# EAGLE board HotlineBling.withname (EAGLE 7.2.0)
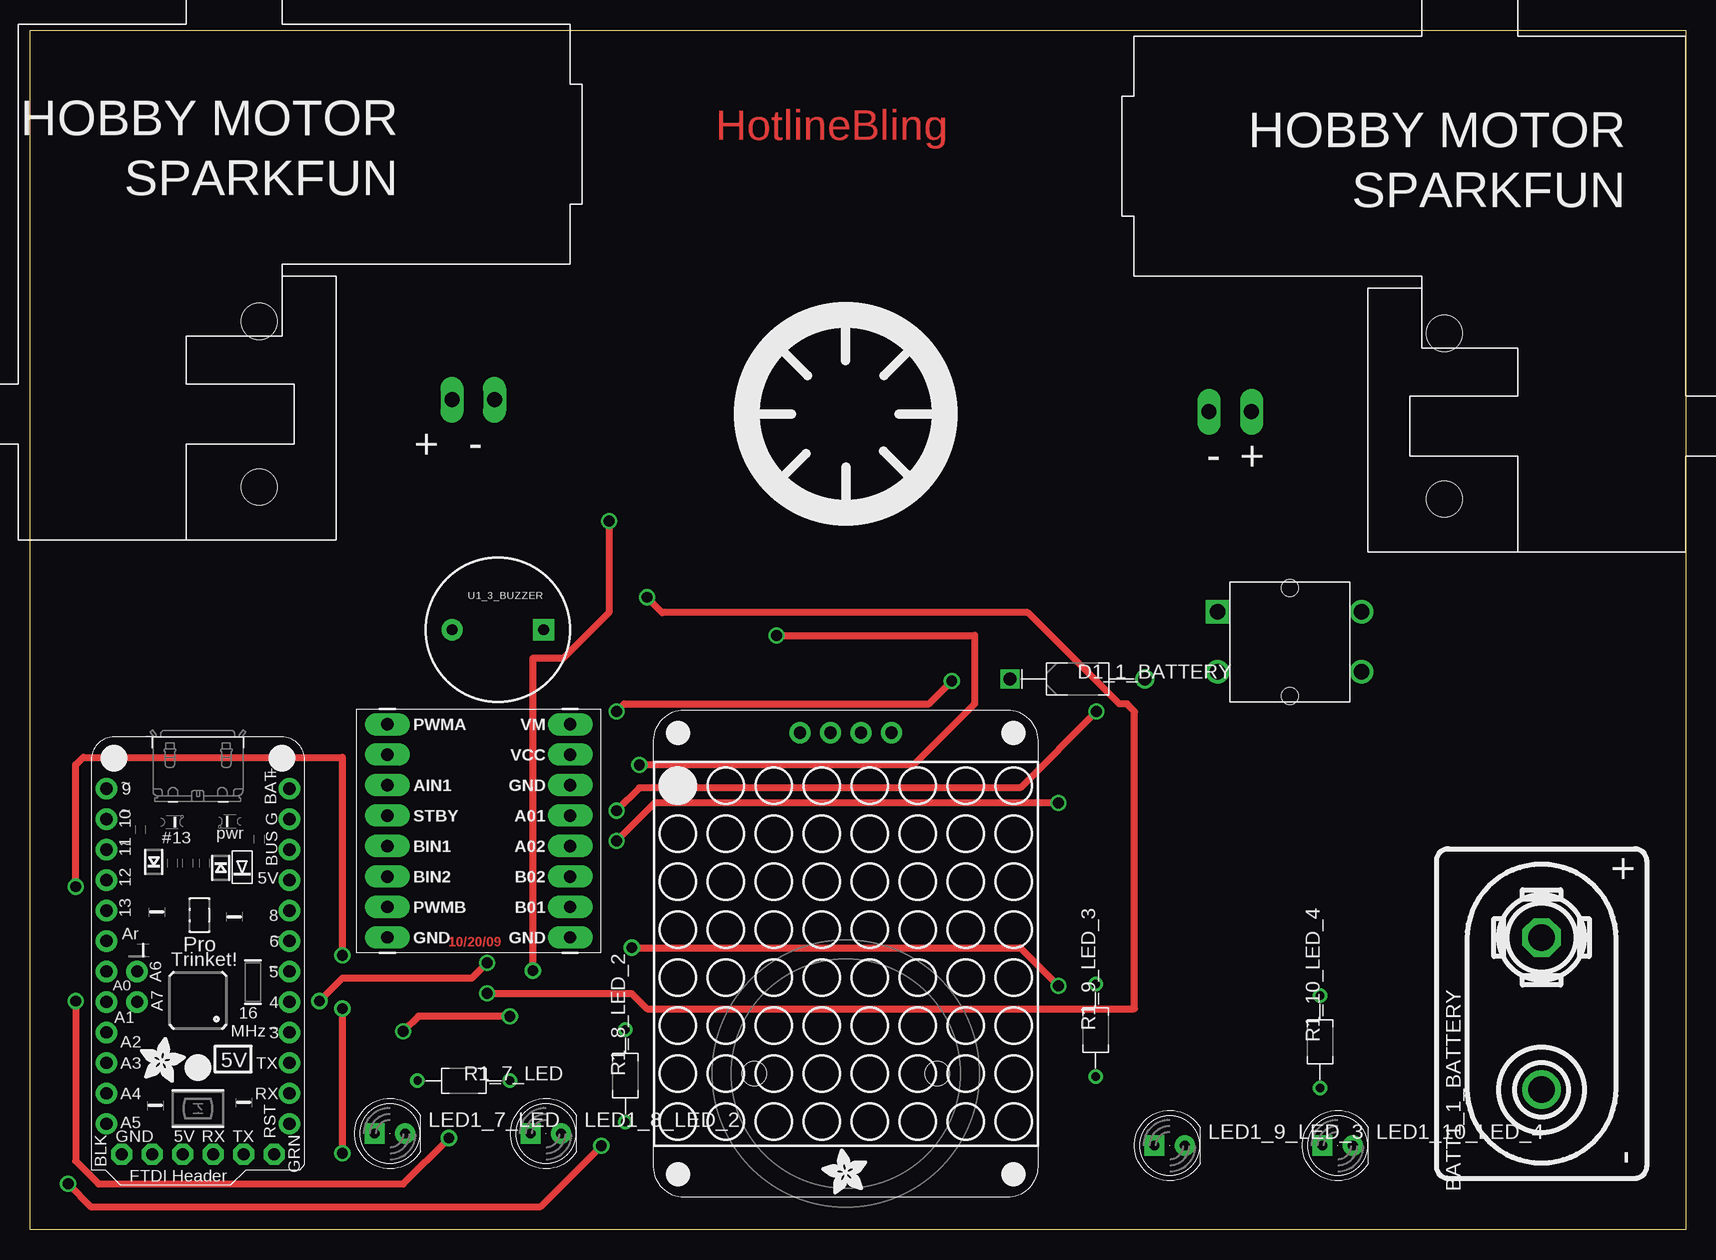
[diagram p0: board, top side]
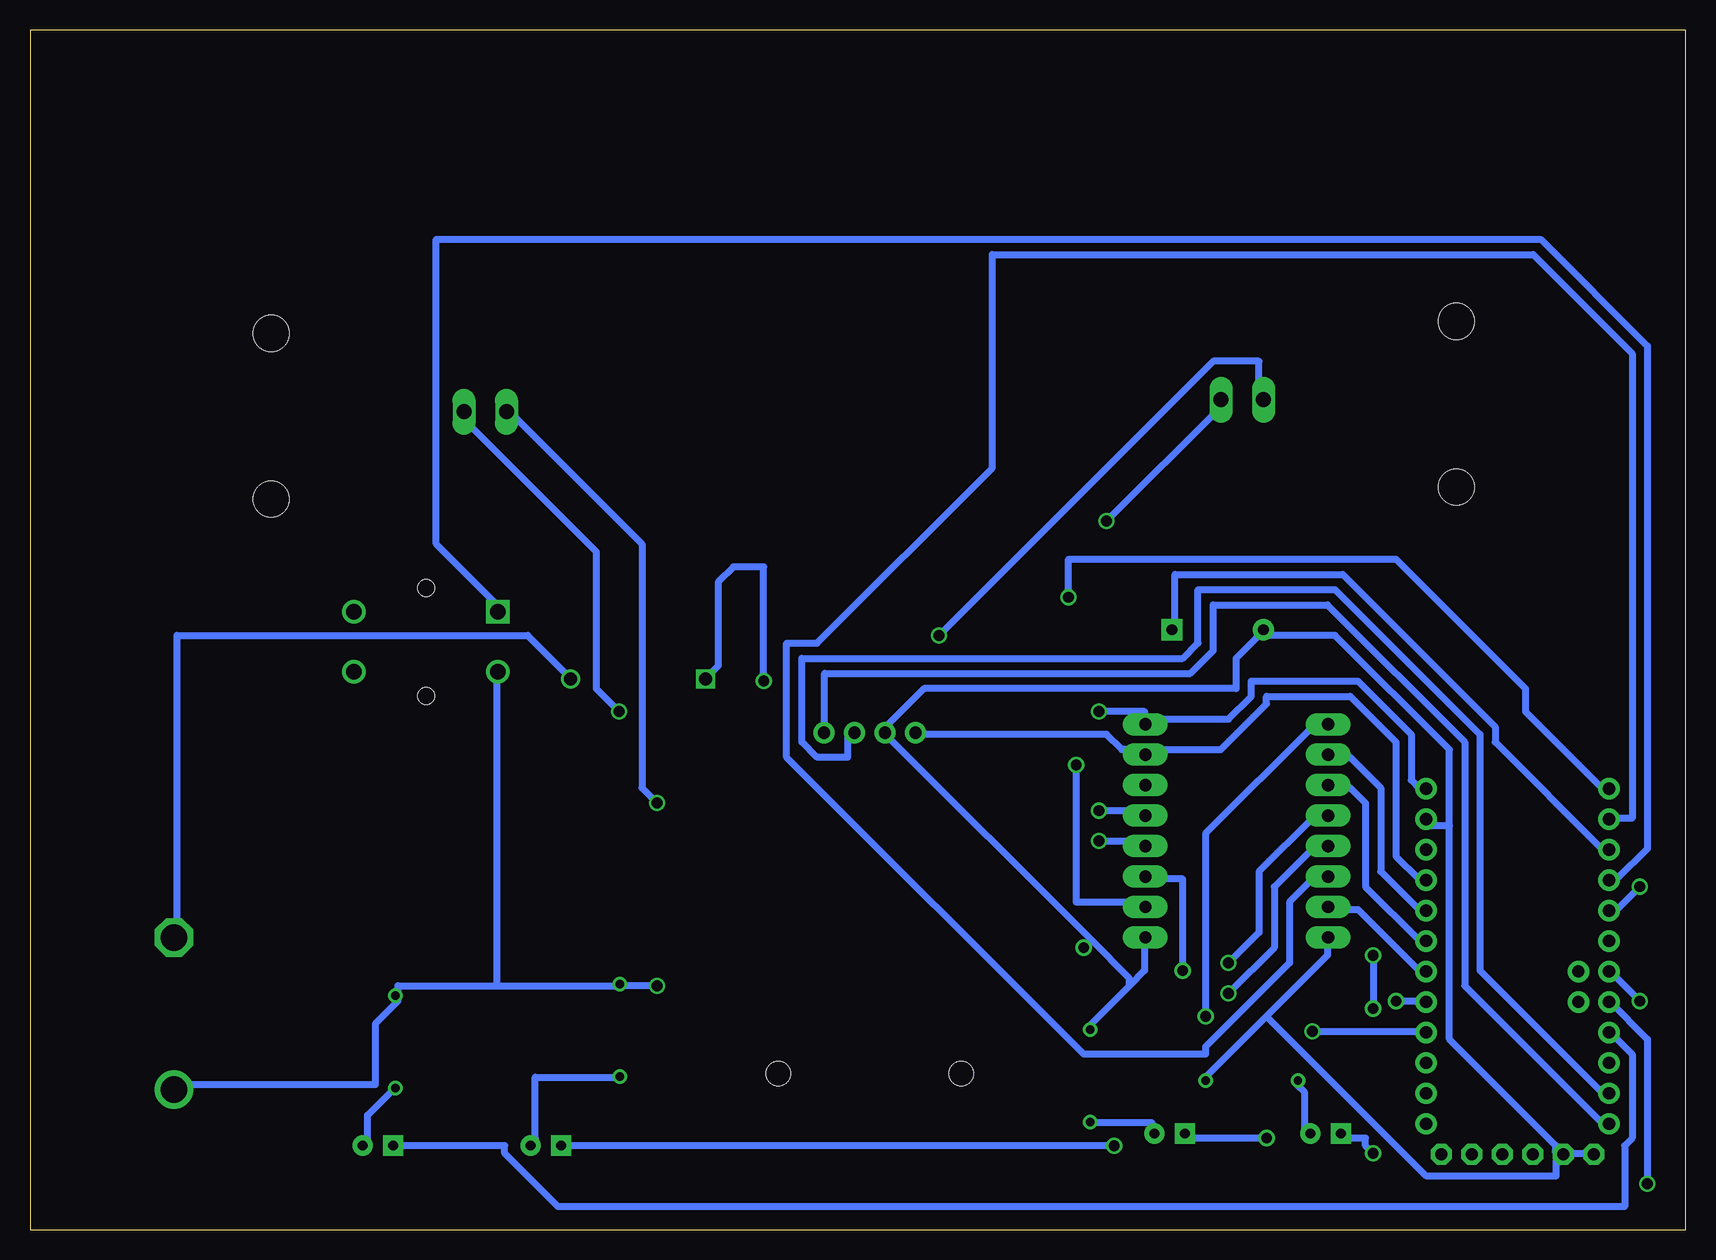
[diagram p1: board, bottom side, seen from below]

Size 138 x 100 mm. Coordinates in mm from the lower left corner, seen from the top.
Outline: 0,0 0,100 138,100 138,0 0,0
Copper layers (1*16): Top 0.035mm / dielectric 1.5mm / Bottom 0.035mm
Design rules "default": minimum track width 0.6mm, minimum drill 0.9mm, track to track 15mil, track to pad 0.6mm, pad to pad 0.5mm, via to via 0.38mm, smd to smd 8mil, copper to edge 40mil, drill to drill 8mil, minimum pad ring 10mil, minimum via ring 8mil, stop-mask expansion 4mil, vias tented up to drill 0mil, thermal gap 10mil
tRestrict: area 106,5.3 to 109.5,8.7; area 106.1,10.3 to 109,13.2; area 106.1,18 to 109,20.9; area 108.5,5.3 to 112,8.7; area 123.4,21.8 to 128.6,26.9; area 123.4,9.1 to 128.6,14.2; area 19.8,14.6 to 23.4,18.2; area 19.8,17.2 to 23.4,20.8; area 19.8,19.7 to 23.4,23.3; area 19.8,22.3 to 23.4,25.8; area 19.8,24.8 to 23.4,28.4; area 19.8,27.3 to 23.4,30.9; 55 more areas
vRestrict: area -32,34 to 47.4,107.6; area 106,4.1 to 111.5,9.9; area 106.2,11 to 108.9,20.3; area 115.8,2.8 to 136.2,33.2; area 27,5.1 to 32.5,10.9; area 27.2,23 to 47.6,43.5; area 31.5,11.1 to 40.8,13.7; area 32.7,43.7 to 45.3,56.3; area 40,5.1 to 45.5,10.9; area 48.3,8.1 to 51,17.5; area 5.1,3.7 to 22.9,41.7; area 51.5,2 to 84.5,44; 7 more areas

## Footprints (pad centres in the part's own frame; a part is rotated, then mirrored left to right if it is on the bottom)
BUTTON-TACTILE-SQUARE-ADAFRUIT1010 = drill 1.3 square: P -6,2.5 | drill 1.3: P2 6,2.5; S -6,-2.5; S2 6,-2.5 | hole 1.4: 0,-4.5; 0,4.5
BATTERY_9V_KEYSTONE_968 = drill 2.2: N 6.35,0 | drill 2.2 octagon: P -6.35,0
DIOAD1125W78L520D270_HS = drill 1.06 pad 1.59: A 5.625,0 | drill 1.06 pad 1.59 square: C -5.625,0
SPARKFUN_DUAL_MOTOR_DRIVER = drill 1.016 pad 1.88 long: A01 7.62,1.27; A02 7.62,-1.27; AIN1 -7.62,3.81; AIN2 -7.62,6.35; B01 7.62,-6.35; B02 7.62,-3.81; BIN1 -7.62,-1.27; BIN2 -7.62,-3.81; GND -7.62,-8.89; GND1 7.62,3.81; GND2 7.62,-8.89; PWMA -7.62,8.89; PWMB -7.62,-6.35; STBY -7.62,1.27; VCC 7.62,6.35; VM 7.62,8.89
SPARKFUN_HOBBY_MOTOR_LEFT = drill 1.27 long: + -41.18,-1.18; - -44.72,-1.18 | hole 3: -25.1,-7.7; -25.1,6.1
LED5MM = drill 0.813 pad 1.676 square: A -1.27,0 | drill 0.813 pad 1.676: K 1.27,0
RESAD770W45L370D210_HS = drill 0.7 pad 1.1: 1 -3.85,0; 2 3.85,0
SPARKFUN_HOBBY_MOTOR = drill 1.27 long: + 41.18,-1.18; - 44.72,-1.18 | hole 3: 25.1,-7.7; 25.1,6.1
ADAFRUIT-PRO-TRINKET-5V = drill 1.016 pad 1.778: +5V 7.62,24.13; A0 -7.62,16.51; A1 -7.62,13.97; A2 -7.62,11.43; A3 -7.62,8.89; A4 -7.62,6.35; A5 -7.62,3.81; AREF -7.62,19.05; D3 7.62,11.43; D4 7.62,13.97; D5 7.62,16.51; D6 7.62,19.05; D8 7.62,21.59; D9 -7.62,31.75; D10 -7.62,29.21; D11 -7.62,26.67; D12 -7.62,24.13; D13 -7.62,21.59; GND2 7.62,29.21; RESET 7.62,3.81; RXD1 7.62,6.35; TXD1 7.62,8.89; VBAT 7.62,31.75; VBUS1 7.62,26.67 | drill 1 pad 1.778: A6 -5.08,16.51; A7 -5.08,13.97 | drill 1.016 pad 1.778 octagon: DTR/RTS 6.35,1.27; GND -6.35,1.27; GND1 -3.81,1.27; RXD 1.27,1.27; TXD 3.81,1.27; VBUS -1.27,1.27
BUZZER-12MM = drill 0.9 pad 1.778 square: + 3.81,0 | drill 0.9 pad 1.778: - -3.81,0
ADAFRUIT-1.2IN-8X8-LED-BACKPACK = drill 1.016 pad 1.778: GND -18.415,-1.27; SCL -18.415,3.81; SDA -18.415,1.27; VDD -18.415,-3.81
ADAFRUIT-3/4IN-CASTER = hole 2: -7.62,0; 7.62,0

## Placement (x,y rotation side)
B1_5_BUTTON  BUTTON-TACTILE-SQUARE  [BUTTON-TACTILE-SQUARE-ADAFRUIT1010]  105,49 0 top
BATT1_1_BATTERY  BATTERY-9V-VERTICAL  [BATTERY_9V_KEYSTONE_968]  126,18 270 top
D1_1_BATTERY  [DIOAD1125W78L520D270_HS]  87.32,45.9 0 top
DRVR_2_DRIVE  SPARKFUN_DUAL_MOTOR_DRIVER-BOB  [SPARKFUN_DUAL_MOTOR_DRIVER]  37.4,33.23 0 top
L_2_DRIVE  SOLARBOTICS_GM2_LEFTSPARKFUN_HOBBY  [SPARKFUN_HOBBY_MOTOR_LEFT]  -6,68 180 top
LED1_7_LED  [LED5MM]  30,8 0 top
LED1_8_LED_2  [LED5MM]  43,8 0 top
LED1_9_LED_3  [LED5MM]  95,7 0 top
LED1_10_LED_4  [LED5MM]  109,7 0 top
R1_7_LED  330  [RESAD770W45L370D210_HS]  36.16,12.4 0 top
R1_8_LED_2  330  [RESAD770W45L370D210_HS]  49.63,12.82 90 top
R1_9_LED_3  330  [RESAD770W45L370D210_HS]  88.83,16.62 90 top
R1_10_LED_4  330  [RESAD770W45L370D210_HS]  107.54,15.65 90 top
R_2_DRIVE  SOLARBOTICS_GM2SPARKFUN_HOBBY  [SPARKFUN_HOBBY_MOTOR]  143,67 180 top
U1_0_BRAIN  [ADAFRUIT-PRO-TRINKET-5V]  14,5 0 top
U1_3_BUZZER  [BUZZER-12MM]  39,50 0 top
U1_4_DISPLAY  [ADAFRUIT-1.2IN-8X8-LED-BACKPACK]  68,23 270 top
U1_6_PENHOLDER  [PENHOLDER]  68,68 180 top
U1_11_CASTER  [ADAFRUIT-3/4IN-CASTER]  68,13 0 top

## Library data of the parts
B1_5_BUTTON BATT1_1_BATTERY L_2_DRIVE LED1_7_LED LED1_8_LED_2 LED1_9_LED_3 LED1_10_LED_4 R_2_DRIVE U1_3_BUZZER U1_6_PENHOLDER U1_11_CASTER = Components
D1_1_BATTERY = KoalaBuild; DATASHEET: http://www.st.com/web/en/resource/technical/document/datasheet/CD00001625.pdf; DB: /Users/sciencectn/Documents/nvsl/Gadgets/Tools/Koala/Koala/PartLibrary/Digikey/Schottky-Diodes-TH.csv; DEVICE: TH-DO-41-AND-DO-204AL; DIST: Digikey; DISTPN: 497-4547-1-ND; IMAGE: http://media.digikey.com/photos/STMicro%20Photos/1N5819.JPG; IRECT: 1A; MFR: STMicroelectronics; MIN_QTY: 1; MPN: 1N5817; PACKAGE: DIOAD1125W78L520D270_HS; PRICE: $0.57; SIZE: TH; STOCK: STOCK; VALUE: 450mV; VREV: 20V
DRVR_2_DRIVE U1_0_BRAIN U1_4_DISPLAY = BOBs
R1_7_LED R1_8_LED_2 R1_9_LED_3 R1_10_LED_4 = KoalaBuild; CASE: TH; DATASHEET: http://www.yageo.com/NewPortal/yageodocoutput?fileName=/pdf/throughhole/Yageo_LR_CFR_2013.pdf; DB: /Users/sciencectn/Documents/nvsl/Gadgets/Tools/Koala/Koala/PartLibrary/Digikey/Resistors-TH.csv; DEVICE: TH-1/6W-CARBON; DIST: Digikey; DISTPN: 330EBK-ND; IMAGE: http://media.digikey.com/Renders/Yageo%20Renders/CFR-12JR-330R.jpg; MFR: Yageo; MIN_QTY: 1; MPN: CFR-12JB-52-330R; PACKAGE: RESAD770W45L370D210_HS; PRICE: $0.10; PWR: 167mW; SIZE: TH; STOCK: STOCK; TOL: 5%; VALUE_QUERY: 330

## Nets
+5V_0_BRAIN: DRVR_2_DRIVE.VCC U1_0_BRAIN.+5V U1_4_DISPLAY.VDD
A0_0_BRAIN: LED1_8_LED_2.A U1_0_BRAIN.A0
A1_0_BRAIN: LED1_9_LED_3.A U1_0_BRAIN.A1
A01_2_DRIVE: DRVR_2_DRIVE.A01 R_2_DRIVE.+
A2_0_BRAIN: LED1_10_LED_4.A U1_0_BRAIN.A2
A02_2_DRIVE: DRVR_2_DRIVE.A02 R_2_DRIVE.-
A3_0_BRAIN: U1_0_BRAIN.A3
A4_0_BRAIN: U1_0_BRAIN.A4 U1_4_DISPLAY.SDA
A5_0_BRAIN: U1_0_BRAIN.A5 U1_4_DISPLAY.SCL
A6_0_BRAIN: U1_0_BRAIN.A6
A7_0_BRAIN: U1_0_BRAIN.A7
AREF_0_BRAIN: U1_0_BRAIN.AREF
B01_2_DRIVE: DRVR_2_DRIVE.B01 L_2_DRIVE.+
B02_2_DRIVE: DRVR_2_DRIVE.B02 L_2_DRIVE.-
D3_0_BRAIN: DRVR_2_DRIVE.PWMA U1_0_BRAIN.D3
D4_0_BRAIN: DRVR_2_DRIVE.STBY U1_0_BRAIN.D4
D5_0_BRAIN: DRVR_2_DRIVE.PWMB U1_0_BRAIN.D5
D6_0_BRAIN: DRVR_2_DRIVE.AIN1 U1_0_BRAIN.D6
D8_0_BRAIN: DRVR_2_DRIVE.AIN2 U1_0_BRAIN.D8
D9_0_BRAIN: DRVR_2_DRIVE.BIN1 U1_0_BRAIN.D9
D10_0_BRAIN: DRVR_2_DRIVE.BIN2 U1_0_BRAIN.D10
D11_0_BRAIN: U1_0_BRAIN.D11 U1_3_BUZZER.+
D12_0_BRAIN: B1_5_BUTTON.P U1_0_BRAIN.D12
D13_0_BRAIN: LED1_7_LED.A U1_0_BRAIN.D13
DTR/RTS_0_BRAIN: U1_0_BRAIN.DTR/RTS
GND1_2_DRIVE: DRVR_2_DRIVE.GND1
GND2_0_BRAIN: B1_5_BUTTON.S BATT1_1_BATTERY.N DRVR_2_DRIVE.GND DRVR_2_DRIVE.GND2 R1_7_LED.2 R1_8_LED_2.2 R1_9_LED_3.2 R1_10_LED_4.2 U1_0_BRAIN.GND U1_0_BRAIN.GND1 U1_0_BRAIN.GND2 U1_3_BUZZER.- U1_4_DISPLAY.GND
N$1_1_BATTERY: BATT1_1_BATTERY.P D1_1_BATTERY.A
N$1_7_LED: LED1_7_LED.K R1_7_LED.1
N$1_8_LED_2: LED1_8_LED_2.K R1_8_LED_2.1
N$1_9_LED_3: LED1_9_LED_3.K R1_9_LED_3.1
N$1_10_LED_4: LED1_10_LED_4.K R1_10_LED_4.1
RESET_0_BRAIN: U1_0_BRAIN.RESET
RXD1_0_BRAIN: U1_0_BRAIN.RXD1
RXD_0_BRAIN: U1_0_BRAIN.RXD
TXD1_0_BRAIN: U1_0_BRAIN.TXD1
TXD_0_BRAIN: U1_0_BRAIN.TXD
VBUS1_0_BRAIN: U1_0_BRAIN.VBUS1
VBUS_0_BRAIN: U1_0_BRAIN.VBUS
VM_2_DRIVE: D1_1_BATTERY.C DRVR_2_DRIVE.VM U1_0_BRAIN.VBAT

## Tracks (layer width: path | path; a pad name or v marks a point on that pad's centre or on a via)
+5V_0_BRAIN
  Bottom 0.6: U1_0_BRAIN.+5V 22.23,29.21 24.13,31.11 24.13,40.64 27.94,44.45 34.92,44.45 34.92,43.81 38.73,40.01 44.45,40.01 DRVR_2_DRIVE.VCC 45.09,40.01 46.99,40.01 48.26,41.27 64.14,41.27 U1_4_DISPLAY.VDD
A0_0_BRAIN  (via drill 0.9)
  Top 0.6: v3.81,19.05 3.81,5.71 5.71,3.81 31.11,3.81 v34.92,7.62
  Bottom 0.6: v34.92,7.62 41.27,7.62 LED1_8_LED_2.A | v3.81,19.05 6.35,21.59 U1_0_BRAIN.A0
A1_0_BRAIN  (via drill 0.9)
  Top 0.6: v3.17,3.81 5.08,1.91 42.55,1.91 v47.62,6.99
  Bottom 0.6: v3.17,3.81 3.17,15.88 6.35,19.05 U1_0_BRAIN.A1 | v47.62,6.99 93.34,6.99 LED1_9_LED_3.A
A01_2_DRIVE  (via drill 0.9)
  Top 0.6: v48.9,34.92 50.8,36.83 82.55,36.83 v88.9,43.18
  Bottom 0.6: R_2_DRIVE.+ 101.6,67.94 101.6,67.31 90.81,56.52 90.81,45.09 v88.9,43.18 | DRVR_2_DRIVE.A01 45.09,34.92 v48.9,34.92
A2_0_BRAIN
  Bottom 0.6: LED1_10_LED_4.A 107.31,6.99 98.42,6.99 98.42,6.35 93.98,1.91 5.08,1.91 5.08,6.99 4.45,7.62 4.45,14.61 6.35,16.51 U1_0_BRAIN.A2
A02_2_DRIVE  (via drill 0.9)
  Top 0.6: v48.9,32.38 52.07,35.56 v85.72,35.56
  Bottom 0.6: DRVR_2_DRIVE.A02 45.09,32.38 v48.9,32.38 | v85.72,35.56 87,36.83 87,57.15 97.79,67.94 R_2_DRIVE.-
A4_0_BRAIN
  Bottom 0.6: U1_0_BRAIN.A4 6.99,11.43 17.14,21.59 17.14,41.27 29.21,53.34 40.64,53.34 40.64,48.9 41.91,47.62 73.66,47.62 73.66,40.64 72.39,39.37 69.85,39.37 69.85,41.27 U1_4_DISPLAY.SDA
A5_0_BRAIN
  Bottom 0.6: U1_0_BRAIN.A5 6.99,8.89 18.41,20.32 18.41,40.64 29.84,52.07 39.37,52.07 39.37,48.26 41.27,46.35 71.75,46.35 71.75,41.91 U1_4_DISPLAY.SCL
B01_2_DRIVE  (via drill 0.9)
  Top 0.6: v62.23,49.53 78.74,49.53 78.74,43.81 73.66,38.73 v50.8,38.73
  Bottom 0.6: L_2_DRIVE.+ 35.56,69.22 35.56,72.39 39.37,72.39 v62.23,49.53 | DRVR_2_DRIVE.B01 45.09,27.3 50.8,27.3 v50.8,38.73
B02_2_DRIVE  (via drill 0.9)
  Top 0.6: v41.91,21.59 41.91,47.62 44.45,47.62 48.26,51.44 v48.26,59.05
  Bottom 0.6: L_2_DRIVE.- 38.73,68.58 v48.26,59.05 | v41.91,21.59 41.91,29.21 44.45,29.21 DRVR_2_DRIVE.B02
D3_0_BRAIN  (via drill 0.9)
  Top 0.6: v31.11,16.51 32.38,17.78 v40.01,17.78
  Bottom 0.6: U1_0_BRAIN.D3 22.23,16.51 v31.11,16.51 | DRVR_2_DRIVE.PWMA 29.84,41.91 31.11,41.91 40.01,33.02 v40.01,17.78
D4_0_BRAIN  (via drill 0.9)
  Top 0.6: v24.13,19.05 26.04,20.95 36.83,20.95 v38.1,22.23
  Bottom 0.6: U1_0_BRAIN.D4 22.23,19.05 v24.13,19.05 | DRVR_2_DRIVE.STBY 29.84,34.29 31.11,34.29 35.56,29.84 35.56,24.77 v38.1,22.23
D5_0_BRAIN
  Bottom 0.6: U1_0_BRAIN.D5 22.23,21.59 27.3,26.67 29.21,26.67 DRVR_2_DRIVE.PWMB
D6_0_BRAIN
  Bottom 0.6: U1_0_BRAIN.D6 22.23,24.13 26.67,28.57 26.67,35.56 27.94,36.83 29.21,36.83 DRVR_2_DRIVE.AIN1
D8_0_BRAIN
  Bottom 0.6: U1_0_BRAIN.D8 22.23,26.67 25.4,29.84 25.4,36.83 27.94,39.37 29.21,39.37 DRVR_2_DRIVE.AIN2
D9_0_BRAIN  (via drill 0.9)
  Top 0.6: v38.1,19.68 50.16,19.68 51.44,18.41 92.08,18.41 92.08,43.18 91.44,43.81 90.81,43.81 83.19,51.44 52.7,51.44 v51.44,52.7
  Bottom 0.6: DRVR_2_DRIVE.BIN1 29.84,31.75 31.11,31.75 34.29,28.57 34.29,23.5 v38.1,19.68 | v51.44,52.7 51.44,55.88 24.13,55.88 13.34,45.09 13.34,43.18 6.99,36.83 U1_0_BRAIN.D9
D10_0_BRAIN
  Bottom 0.6: DRVR_2_DRIVE.BIN2 29.84,29.21 31.11,29.21 33.02,27.3 33.02,22.23 40.01,15.24 40.01,14.61 50.16,14.61 74.93,39.37 74.93,48.9 72.39,48.9 57.78,63.5 57.78,81.28 12.7,81.28 4.45,73.03 4.45,34.29 6.35,34.29 U1_0_BRAIN.D10
D11_0_BRAIN
  Bottom 0.6: U1_3_BUZZER.+ 42.55,50.16 42.55,54.61 28.57,54.61 15.88,41.91 15.88,40.64 6.99,31.75 U1_0_BRAIN.D11
D12_0_BRAIN
  Bottom 0.6: U1_0_BRAIN.D12 6.35,29.21 5.71,29.21 3.17,31.75 3.17,73.66 12.06,82.55 104.14,82.55 104.14,57.15 99.06,52.07 B1_5_BUTTON.P
D13_0_BRAIN  (via drill 0.9)
  Top 0.6: v26.04,18.41 v26.04,6.35 | v26.04,22.86 26.04,39.37 4.45,39.37 3.81,38.73 v3.81,28.57
  Bottom 0.6: v26.04,22.86 v26.04,18.41 | v26.04,6.35 26.67,6.99 26.67,7.62 28.57,7.62 LED1_7_LED.A | v3.81,28.57 6.35,26.04 U1_0_BRAIN.D13
GND2_0_BRAIN  (via drill 0.9)
  Top 0.6: v50.16,23.5 82.55,23.5 v85.72,20.32
  Bottom 0.6: U1_0_BRAIN.GND1 10.16,6.35 8.26,6.35 U1_0_BRAIN.GND | U1_0_BRAIN.GND1 10.79,5.71 10.79,4.45 21.59,4.45 34.92,17.78 | U1_0_BRAIN.GND1 10.79,6.35 10.79,6.99 19.68,15.88 19.68,33.66 | 99.06,20.32 107.31,20.32 107.31,19.68 R1_10_LED_4.2 107.31,19.05 109.22,17.14 109.22,12.06 125.73,12.06 BATT1_1_BATTERY.N | 19.68,33.66 19.68,40.01 29.21,49.53 34.92,49.53 U1_3_BUZZER.- 35.56,49.53 37.47,47.62 37.47,45.09 63.5,45.09 66.67,41.91 U1_4_DISPLAY.GND 66.67,41.27 49.53,24.13 | 19.68,33.66 21.59,33.66 U1_0_BRAIN.GND2 | 34.92,17.78 29.84,22.86 29.84,24.13 DRVR_2_DRIVE.GND | 34.92,17.78 40.01,12.7 R1_7_LED.2 | 46.35,20.32 45.09,21.59 45.09,24.13 DRVR_2_DRIVE.GND2 | 46.35,20.32 46.35,20.95 49.53,24.13 | 46.35,20.32 49.53,17.14 R1_8_LED_2.2 | 49.53,24.13 v50.16,23.5 | v85.72,20.32 88.27,20.32 R1_9_LED_3.2 88.9,20.32 99.06,20.32 | 99.06,20.32 99.06,46.35 B1_5_BUTTON.S
N$1_1_BATTERY
  Bottom 0.6: BATT1_1_BATTERY.P 125.73,24.77 125.73,49.53 96.52,49.53 93.34,46.35 D1_1_BATTERY.A
N$1_7_LED
  Bottom 0.6: LED1_7_LED.K 31.75,8.26 31.75,11.43 32.38,12.06 R1_7_LED.1
N$1_8_LED_2
  Bottom 0.6: LED1_8_LED_2.K 44.45,8.26 44.45,8.89 49.53,8.89 R1_8_LED_2.1
N$1_9_LED_3
  Bottom 0.6: R1_9_LED_3.1 88.9,12.7 95.89,12.7 95.89,7.62 LED1_9_LED_3.K
N$1_10_LED_4
  Bottom 0.6: R1_10_LED_4.1 107.95,11.43 109.86,9.53 109.86,7.62 LED1_10_LED_4.K
VM_2_DRIVE  (via drill 0.9)
  Top 0.6: v48.9,43.18 49.53,43.81 74.93,43.81 v76.83,45.72
  Bottom 0.6: U1_0_BRAIN.VBAT 22.23,36.83 22.86,37.47 22.86,41.27 27.3,45.72 36.2,45.72 36.2,44.45 38.1,42.55 44.45,42.55 DRVR_2_DRIVE.VM 45.09,42.55 45.09,43.18 v48.9,43.18 | v76.83,45.72 76.83,55.24 79.38,55.24 80.64,53.98 80.64,46.99 81.28,46.35 D1_1_BATTERY.C

## Text on the board
Top: HotlineBling